# Altium PCB TEST.PcbDoc
Units mil, origin at the board's own origin, x right, y up, seen from the top; angles counter-clockwise.
Board outline 6000 x 4000 mil, 2 copper layers (Top Layer, Bottom Layer); 4 components, 15 nets, 271 pads, 0 vias.
Unrouted connection lines stored in the file: 70.
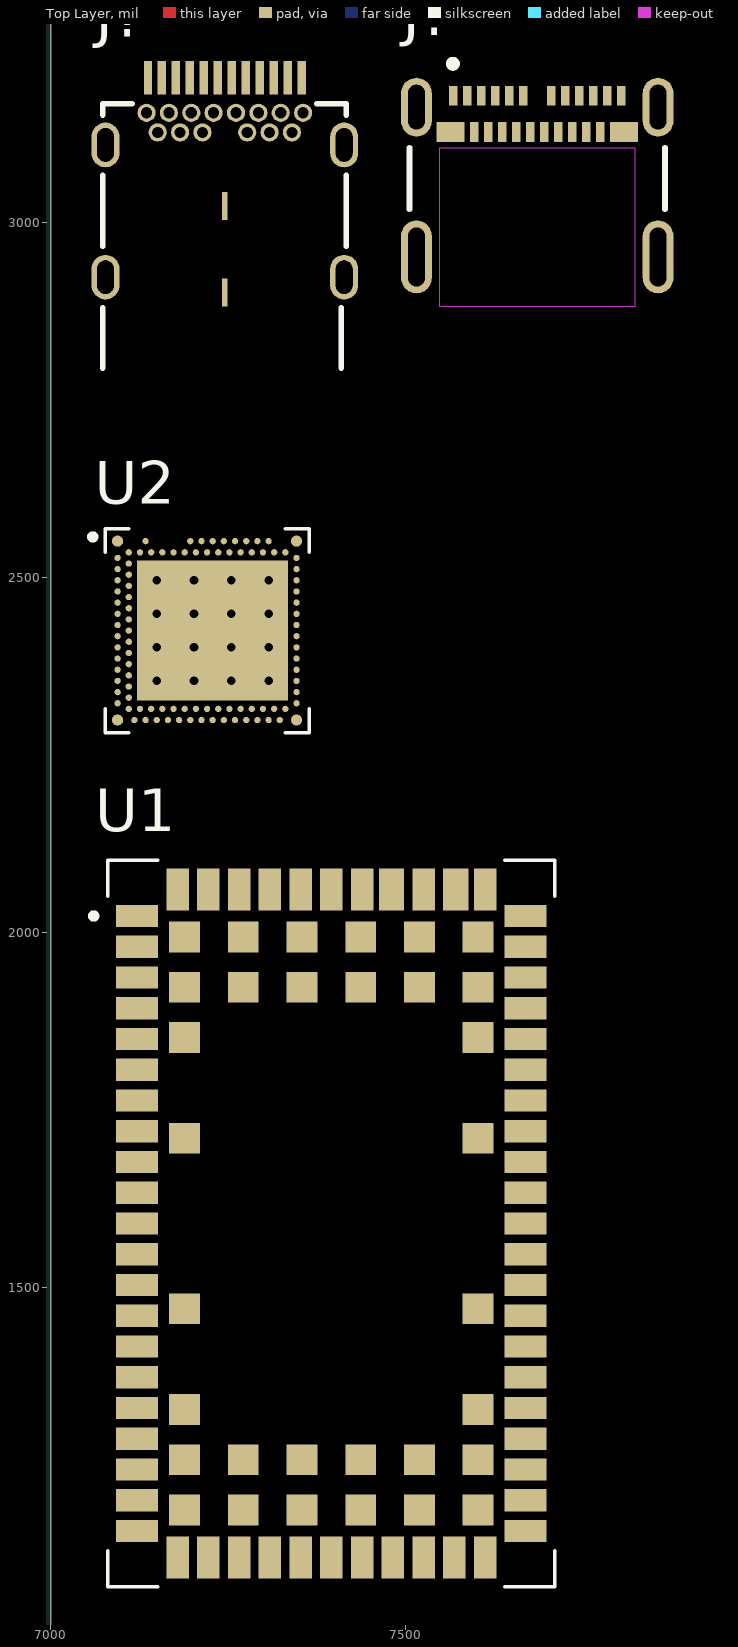
[diagram p0: Top Layer view]
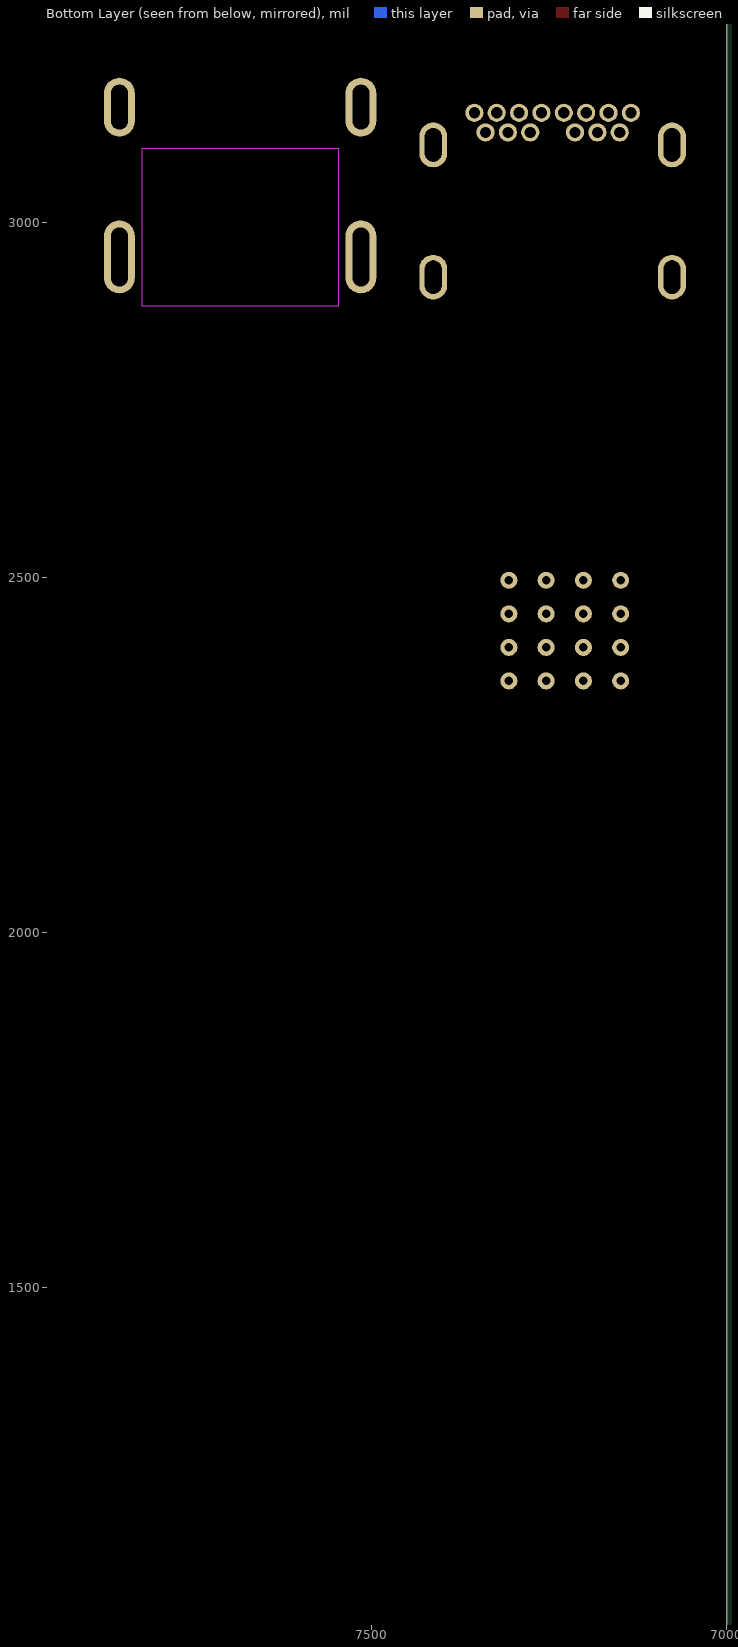
[diagram p1: Bottom Layer view, seen from below]

## Layer stack, top to bottom
Top Solder: solder mask 0.4, Solder Resist, Dk 3.5
Top Layer: signal copper 1.4
Dielectric 1: dielectric 12.6, FR-4, Dk 4.8
Bottom Layer: signal copper 1.4
Bottom Solder: solder mask 0.4, Solder Resist, Dk 3.5

## Board outline
1000,1000 7000,1000 7000,5000 1000,5000

## Design rules (kind name [scope] priority, off if disabled: settings)
Clearance [All] p1: gap=10 ignorepadtopadclearanceinfootprint=FALSE except(0: Arc-Hole Track-Hole SMDPad-Hole THPad-Hole Via-Hole Fill-Hole Poly-Hole Region-Hole Text-Hole)
DiffPairsRouting [All] p1: maxlimit=10 minlimit=10 mostfreqgap=10 toplayer_minwidth=15 toplayer_maxwidth=15 toplayer_prefwidth=15 bottomlayer_minwidth=15 bottomlayer_maxwidth=15 bottomlayer_prefwidth=15 maxuncoupledlength=500
PolygonConnect [All] p1: connectstyle=Relief reliefconductorwidth=10 reliefentries=4 polygonreliefangle="90 Angle" airgapwidth=10
RoomDefinition USB_C [InComponentClass('USB_C')] p1: confinementstyle=ConfineIn formatcopy=TRUE lockcomponents=FALSE outline 7045,2730 7890,2730 7890,3340 7045,3340
RoomDefinition nRF [InComponentClass('nRF')] p2: confinementstyle=ConfineIn formatcopy=TRUE lockcomponents=FALSE outline 7045,2270 7375,2270 7375,2680 7045,2680
RoomDefinition modem [InComponentClass('modem')] p3: confinementstyle=ConfineIn formatcopy=TRUE lockcomponents=FALSE outline 7045,1060 7730,1060 7730,2220 7045,2220
RoutingVias [All] p1: holewidth=28 width=50 viastyle="Through Hole" minholewidth=28 minwidth=50 maxholewidth=28 maxwidth=50
SolderMaskExpansion [All] p1: expansion=4 istentingtop=FALSE
Width [All] p1: maxlimit=10 minlimit=10 preferedwidth=10
29 further rules are at their usual default settings.

## Classes and differential pairs
component class USB_C: J?
component class nRF: C? U2
component class modem: U1
differential pair USB_D: +USB_D_P -USB_D_N

## Components (designator, comment, footprint, x,y, rotation, side; value= is the part's Value field where it differs from the comment)
J? "1054500101" FP-1054500101-MFG 7685,3030 r0 top
J? "632723100011" 632723100011 7245,2970 r0 top
U1 "SARA-R510S-00B" "MODULE_SARA-R510S-00B - CORRECTED" 7395,1590 r0 top
U2 "NRF5340-QKAA-R7" XCVR_NRF5340-QKAA-R7 7220,2425 r0 top

## Footprints (in the part's own frame and the unit in brackets; to place one, negate y for a bottom-side part, rotate by r counter-clockwise, add the part's x,y. Pads: shape width x height; smd on the part's side, far side on the other; paste and mask are expansions set on the pad)
632723100011 [mm] "USB 3.1 Type C Receptacle Horizontal THR"
  rect 0.3x1.2 smd: A1(-2.75,5.93) A2(-2.25,5.93) A3(-1.75,5.93) A4(-1.25,5.93) A5(-0.75,5.93) A6(-0.25,5.93) A7(0.25,5.93) A8(0.75,5.93) A9(1.25,5.93) A10(1.75,5.93) A11(2.25,5.93) A12(2.75,5.93)
  round 0.65 hole 0.4: B1(2.8,4.68) B2(2.4,3.98) B3(1.6,3.98) B4(1.2,4.68) B5(0.8,3.98) B6(0.4,4.68) B7(-0.4,4.68) B8(-0.8,3.98) B9(-1.2,4.68) B10(-1.6,3.98) B11(-2.4,3.98) B12(-2.8,4.68) G1(2,4.68) G2(-2,4.68)
  oval 1x1.6 hole 0.6 slot 1.2 at 90 deg: Shell(-4.27,-1.2) Shell(-4.27,3.53) Shell(4.27,-1.2) Shell(4.27,3.53)
  rect 0.2x1 smd: Shell(0,-1.75) Shell(0,1.35)
  silkscreen extent -4.37,-4.45 4.34,5, body extent -4.37,-5.6 4.37,6.19, height 3.05
FP-1054500101-MFG [mm]
  rrect100% 1.1x2.1 hole 1.6 slot 0.6 at 0 deg paste-1000 mask+0: 1(-4.32,3.36) 2(4.32,3.36)
  rrect100% 1.1x2.6 hole 2.1 slot 0.6 at 0 deg paste-1000 mask+0: 3(-4.32,-2) 4(4.32,-2)
  rect 0.3x0.7 smd paste+0 mask+0: A1(-3,3.77) A2(-2.5,3.77) A3(-2,3.77) A4(-1.5,3.77) A5(-1,3.77) A6(-0.5,3.77) A7(0.5,3.77) A8(1,3.77) A9(1.5,3.77) A10(2,3.77) A11(2.5,3.77) A12(3,3.77) B2(2.25,2.47) B3(1.75,2.47) B4(1.25,2.47) B5(0.75,2.47) B6(0.25,2.47) B7(-0.25,2.47) B8(-0.75,2.47) B9(-1.25,2.47) B10(-1.75,2.47) B11(-2.25,2.47)
  rect 1x0.7 smd paste+0 mask+0: B1(3.1,2.47) B12(-3.1,2.47)
  Keep-Out Layer region: -3.5,-3.77 3.5,-3.77 3.5,1.88 -3.5,1.88
  silkscreen extent -4.57,-0.3 4.57,5.03
"MODULE_SARA-R510S-00B - CORRECTED" [mm]
  rect 1.5x0.8 smd paste-2: 1(-6.95,11) 2(-6.95,9.9) 3(-6.95,8.8) 4(-6.95,7.7) 5(-6.95,6.6) 6(-6.95,5.5) 7(-6.95,4.4) 8(-6.95,3.3) 9(-6.95,2.2) 10(-6.95,1.1) 11(-6.95,0) 12(-6.95,-1.1) 13(-6.95,-2.2) 14(-6.95,-3.3) 15(-6.95,-4.4) 16(-6.95,-5.5) 17(-6.95,-6.6) 18(-6.95,-7.7) 19(-6.95,-8.8) 20(-6.95,-9.9) 21(-6.95,-11) 33(6.95,-11) 34(6.95,-9.9) 35(6.95,-8.8) 36(6.95,-7.7) 37(6.95,-6.6) 38(6.95,-5.5) 39(6.95,-4.4) 40(6.95,-3.3) 41(6.95,-2.2) 42(6.95,-1.1) 43(6.95,0) 44(6.95,1.1) 45(6.95,2.2) 46(6.95,3.3) 47(6.95,4.4) 48(6.95,5.5) 49(6.95,6.6) 50(6.95,7.7) 51(6.95,8.8) 52(6.95,9.9) 53(6.95,11)
  rect 0.8x1.5 smd paste-2: 22(-5.5,-11.95) 23(-4.4,-11.95) 24(-3.3,-11.95) 25(-2.2,-11.95) 26(-1.1,-11.95) 27(0,-11.95) 28(1.1,-11.95) 29(2.2,-11.95) 30(3.3,-11.95) 31(4.4,-11.95) 32(5.5,-11.95) 54(5.5,11.95) 56(3.3,11.95) 58(1.1,11.95) 59(0,11.95) 60(-1.1,11.95) 61(-2.2,11.95) 62(-3.3,11.95) 63(-4.4,11.95) 64(-5.5,11.95)
  rect 0.9x1.5 smd paste-2: 55(4.45,11.95) 57(2.15,11.95)
  rect 1.1x1.1 smd paste-0.025: 65(-5.25,10.25) 66(-3.15,10.25) 67(-1.05,10.25) 68(1.05,10.25) 69(3.15,10.25) 70(5.25,10.25) 71(-5.25,8.45) 72(-3.15,8.45) 73(-1.05,8.45) 74(1.05,8.45) 75(3.15,8.45) 76(5.25,8.45) 77(-5.25,6.65) 78(5.25,6.65) 79(-5.25,3.05) 80(5.25,3.05) 81(-5.25,-3.05) 82(5.25,-3.05) 83(-5.25,-6.65) 84(5.25,-6.65) 85(-5.25,-8.45) 86(-3.15,-8.45) 87(-1.05,-8.45) 88(1.05,-8.45) 89(3.15,-8.45) 90(5.25,-8.45) 91(-5.25,-10.25) 92(-3.15,-10.25) 93(-1.05,-10.25) 94(1.05,-10.25) 95(3.15,-10.25) 96(5.25,-10.25)
  silkscreen extent -8.6,-13 8,13, body extent -8,-13 8,13, height 2.78
XCVR_NRF5340-QKAA-R7 [mm]
  round 0.61 hole 0.305: 35(-1.8,-1.8) 36(-0.467,-1.8) 37(0.867,-1.8) 38(2.2,-1.8) 39(-1.8,-0.6) 40(-0.467,-0.6) 41(0.867,-0.6) 43(2.2,-0.6) 44(-1.8,0.6) 45(-0.467,0.6) 46(0.867,0.6) 47(2.2,0.6) 48(-1.8,1.8) 49(-0.467,1.8) 50(0.867,1.8) 51(2.2,1.8)
  rect 5.4x5 smd paste-4: 104(0.2,0)
  round 0.4 smd paste-0.006: A1(-3.2,3.2) A31(3.2,3.2) AL1(-3.2,-3.2) AL31(3.2,-3.2)
  round 0.225 smd paste-0.006: A5(-2.2,3.2) A13(-0.6,3.2) A15(-0.2,3.2) A17(0.2,3.2) A19(0.6,3.2) A21(1,3.2) A23(1.4,3.2) A25(1.8,3.2) A27(2.2,3.2) AA1(-3.2,-1) AA31(3.2,-1) AB2(-2.8,-1.2) AC1(-3.2,-1.4) AC31(3.2,-1.4) AD2(-2.8,-1.6) AE1(-3.2,-1.8) AE31(3.2,-1.8) AF2(-2.8,-2) AG1(-3.2,-2.2) AG31(3.2,-2.2) AH2(-2.8,-2.4) AJ1(-3.2,-2.6) AJ31(3.2,-2.6) AK2(-2.8,-2.8) AK4(-2.4,-2.8) AK6(-2,-2.8) AK8(-1.6,-2.8) AK10(-1.2,-2.8) AK12(-0.8,-2.8) AK14(-0.4,-2.8) AK16(0,-2.8) AK18(0.4,-2.8) AK20(0.8,-2.8) AK22(1.2,-2.8) AK24(1.6,-2.8) AK26(2,-2.8) AK28(2.4,-2.8) AK30(2.8,-2.8) AL3(-2.6,-3.2) AL5(-2.2,-3.2) AL7(-1.8,-3.2) AL9(-1.4,-3.2) AL11(-1,-3.2) AL13(-0.6,-3.2) AL15(-0.2,-3.2) AL17(0.2,-3.2) AL19(0.6,-3.2) AL21(1,-3.2) AL23(1.4,-3.2) AL25(1.8,-3.2) AL27(2.2,-3.2) AL29(2.6,-3.2) B2(-2.8,2.8) B4(-2.4,2.8) B6(-2,2.8) B8(-1.6,2.8) B10(-1.2,2.8) B12(-0.8,2.8) B14(-0.4,2.8) B16(0,2.8) B18(0.4,2.8) B20(0.8,2.8) B22(1.2,2.8) B24(1.6,2.8) B26(2,2.8) B28(2.4,2.8) B30(2.8,2.8) C1(-3.2,2.6) C31(3.2,2.6) D2(-2.8,2.4) E1(-3.2,2.2) E31(3.2,2.2) F2(-2.8,2) G1(-3.2,1.8) G31(3.2,1.8) H2(-2.8,1.6) J1(-3.2,1.4) J31(3.2,1.4) K2(-2.8,1.2) L1(-3.2,1) L31(3.2,1) M2(-2.8,0.8) N1(-3.2,0.6) N31(3.2,0.6) P2(-2.8,0.4) R1(-3.2,0.2) R31(3.2,0.2) T2(-2.8,0) U1(-3.2,-0.2) U31(3.2,-0.2) V2(-2.8,-0.4) W1(-3.2,-0.6) W31(3.2,-0.6) Y2(-2.8,-0.8)
  silkscreen extent -4.19,-3.65 3.65,3.65, body extent -3.5,-3.5 3.5,3.5, height 0.85

## Part data
J?: library part CMP-04767-000004-1, "CONN RCP USB3.1 TYPEC 24P SMD RA", Current Rating=0.25/1.25/5A, Manufacturer=Molex, Package=0, Temperature="-30°C to +85°C", Temperature Range High=+85°C, Temperature Range Low=-30°C, Voltage Rating=30V, Automotive=No, Category=Conn, ComponentLink2Description=Datasheet, ComponentLink2URL=https://www.molex.com/webdocs/datasheets/pdf/en-us/1054500101_IO_CONNECTORS.pdf, Conn Orientation="Right Angle", Contact Material=Gold,Nickel, Device Class L1=Connectors, Device Class L2="USB Connectors", Device Class L3=unset, Digikey Description="CONN RCP USB3.1 TYPEC 24P SMD RA", Footprint Url=https://www.molex.com/pdm_docs/sd/1054500101_sd.pdf, Height=3.44mm, Is Female=yes, Lead Free=Yes, Manufacturer Part Number=1054500101, Mouser Description="USB Shielded I/O Receptacle; Type C; Right Angle; Surface Mount; Gold over Nickel", Number Of Contacts=24, Octopart=https://octopart.com/105450-0101-molex-68082325, Pitch=0.5mm, RoHS=TRUE, Shielding=true, Usb Standard="USB 3.1"
J?: library part CMP-1502-03213-1, "USB 3.1 Type C Receptacle WR-COM, Horizontal, SMT / THT", Contact Resistance=30mOhm, Manufacturer="Wurth Elektronik", Operating Temperature=-40to105degC, Rated Current=5A, Working Voltage=20VDC, Connector Type=USB3.1TypeC, Datasheet URL=https://katalog.we-online.de/em/datasheet/632723x00011%282%29.pdf, Gender=Receptacle, Manufacturer URL=http://www.we-online.de, Mounting Technology=SMT/THT, Orientation=Horizontal, Package Reference=632723100011, Packaging=TapeandReel, Part Number=632723100011, Publisher=WurthElektronik
U1: "Cellular LTE Cat M1, LTE Cat NB2 Transceiver Module 600MHz, 700MHz, 750MHz, 800MHz, 850MHz, 900MHz, 1.7GHz, 1.8GHz, 1.9GHz, 2.1GHz Antenna Not Included Surface Mount", Package="SMD-96 u-blox", Availability="In Stock", Check_prices=https://www.snapeda.com/parts/SARA-R510S-00B/u-blox/view-part/?ref=eda, MF=U-Blox, MP=SARA-R510S-00B, Price=None, Purchase-URL=https://pricing.snapeda.com/search/part/SARA-R510S-00B/?ref=eda, SnapEDA_Link=https://www.snapeda.com/parts/SARA-R510S-00B/u-blox/view-part/?ref=snap
U2: "RF System on a Chip - SoC Dual-core Bluetooth 5.2 SoC supporting Bluetooth Low Energy, Bluetooth mesh, NFC, Thread, and Zigbee", Package=None, Availability="In Stock", Check_prices=https://www.snapeda.com/parts/NRF5340-QKAA-R7/Nordic+Semiconductor+ASA/view-part/?ref=eda, MF="Nordic Semiconductor ASA", MP=NRF5340-QKAA-R7, Price=None, Purchase-URL=https://pricing.snapeda.com/search/part/NRF5340-QKAA-R7/?ref=eda, SnapEDA_Link=https://www.snapeda.com/parts/NRF5340-QKAA-R7/Nordic+Semiconductor+ASA/view-part/?ref=snap

## Nets (pads, with @x,y where several pads share a name; then routed paths per layer and width w, separated by ;. In a path a pad name is that pad's centre, name@x,y a point inside that pad or via, vN(x,y) a via of type N, cw(c..) or ccw(c..) an arc to the next point about the centre after c; other vN are vias at no path point)
GND: U2.35 U2.36 U2.37 U2.38 U2.39 U2.40 U2.41 U2.43 U2.44 U2.45 U2.46 U2.47 U2.48 U2.49 U2.50 U2.51 U2.104 U2.A25 U2.B12 U2.B26 U2.G1 U2.H2 U2.J31
GND1: U1.1 U1.3 U1.5 U1.14 U1.20 U1.21 U1.22 U1.30 U1.32 U1.43 U1.50 U1.54 U1.55 U1.57 U1.58
GND2: U1.59 U1.60 U1.61 U1.63 U1.64 U1.65 U1.66 U1.67 U1.68 U1.69 U1.70 U1.71 U1.72 U1.73
GND3: U1.75 U1.76 U1.77 U1.78 U1.79 U1.80 U1.81 U1.82 U1.83 U1.84 U1.85 U1.86 U1.87 U1.88 U1.89
GND4: U1.90 U1.91 U1.92 U1.93 U1.94 U1.95 U1.96
NetC?_2: U2.A27 U2.G31
NetU1_26: U1.26
NetU1_27: U1.27
NetU1_44: U1.44
NetU1_47: U1.47
NetU1_48: U1.48
NetU1_49: U1.49
USB_D_N: U1.28
USB_D_P: U1.29
VCC: U1.51 U1.52 U1.53 U2.A19 U2.AC1 U2.AG1 U2.AJ31 U2.AL3 U2.AL7 U2.AL11 U2.AL17 U2.AL25 U2.B28 U2.C1 U2.E31 U2.N31 U2.U1
pads on no net: J?.1 J?.2 J?.3 J?.4 J?.A1 J?.A2 J?.A3 J?.A4 J?.A5 J?.A6 J?.A7 J?.A8 J?.A9 J?.A10 J?.A11 J?.A12 J?.B1 J?.B2 J?.B3 J?.B4 J?.B5 J?.B6 J?.B7 J?.B8 J?.B9 J?.B10 J?.B11 J?.B12 J?.G1 J?.G2 J?.Shell U1.2 U1.4 U1.6 U1.7 U1.8 U1.9 U1.10 U1.11 U1.12 U1.13 U1.15 U1.16 U1.17 U1.18 U1.19 U1.23 U1.24 U1.25 U1.31 U1.33 U1.34 U1.35 U1.36 U1.37 U1.38 U1.39 U1.40 U1.41 U1.42 U1.45 U1.46 U1.56 U1.62 U1.74 U2.A1 U2.A5 U2.A13 U2.A15 U2.A17 U2.A21 U2.A23 U2.A31 U2.AA1 U2.AA31 U2.AB2 U2.AC31 U2.AD2 U2.AE1 U2.AE31 U2.AF2 U2.AG31 U2.AH2 U2.AJ1 U2.AK2 U2.AK4 U2.AK6 U2.AK8 U2.AK10 U2.AK12 U2.AK14 U2.AK16 U2.AK18 U2.AK20 U2.AK22 U2.AK24 U2.AK26 U2.AK28 U2.AK30 U2.AL1 U2.AL5 U2.AL9 U2.AL13 U2.AL15 U2.AL19 U2.AL21 U2.AL23 U2.AL27 U2.AL29 U2.AL31 U2.B2 U2.B4 U2.B6 U2.B8 U2.B10 U2.B14 U2.B16 U2.B18 U2.B20 U2.B22 U2.B24 U2.B30 U2.C31 U2.D2 U2.E1 U2.F2 U2.J1 U2.K2 U2.L1 U2.L31 U2.M2 U2.N1 U2.P2 U2.R1 U2.R31 U2.T2 U2.U31 U2.V2 U2.W1 U2.W31 U2.Y2

## Text inside footprints (layer, text, board x,y; h text height)
J?: Mechanical 2 "PCB Edge" at 7178.07,2749.53 h24